# Altium PCB bdk_pl_power_connector.PcbDoc
Units mm, origin at the board's own origin, x right, y up, seen from the top; angles counter-clockwise.
Board outline 39.85 x 90.17 mm, 3 copper layers (Top Layer, Middle Layer, Bottom Layer), stack 0.49 mm thick; 3 components, 6 nets, 116 pads, 3 vias.
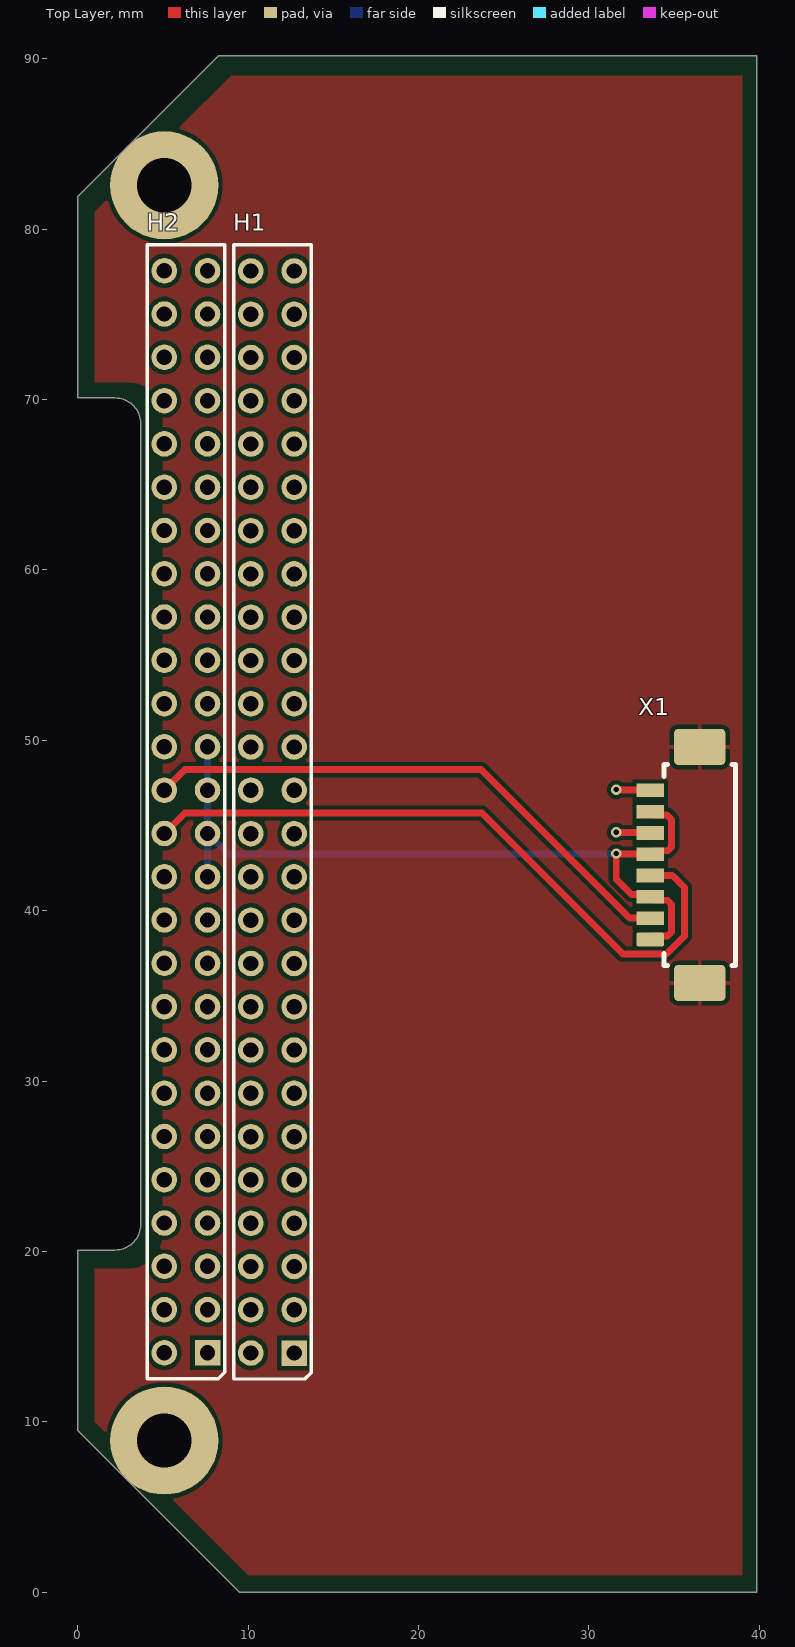
[diagram p0: Top Layer view]
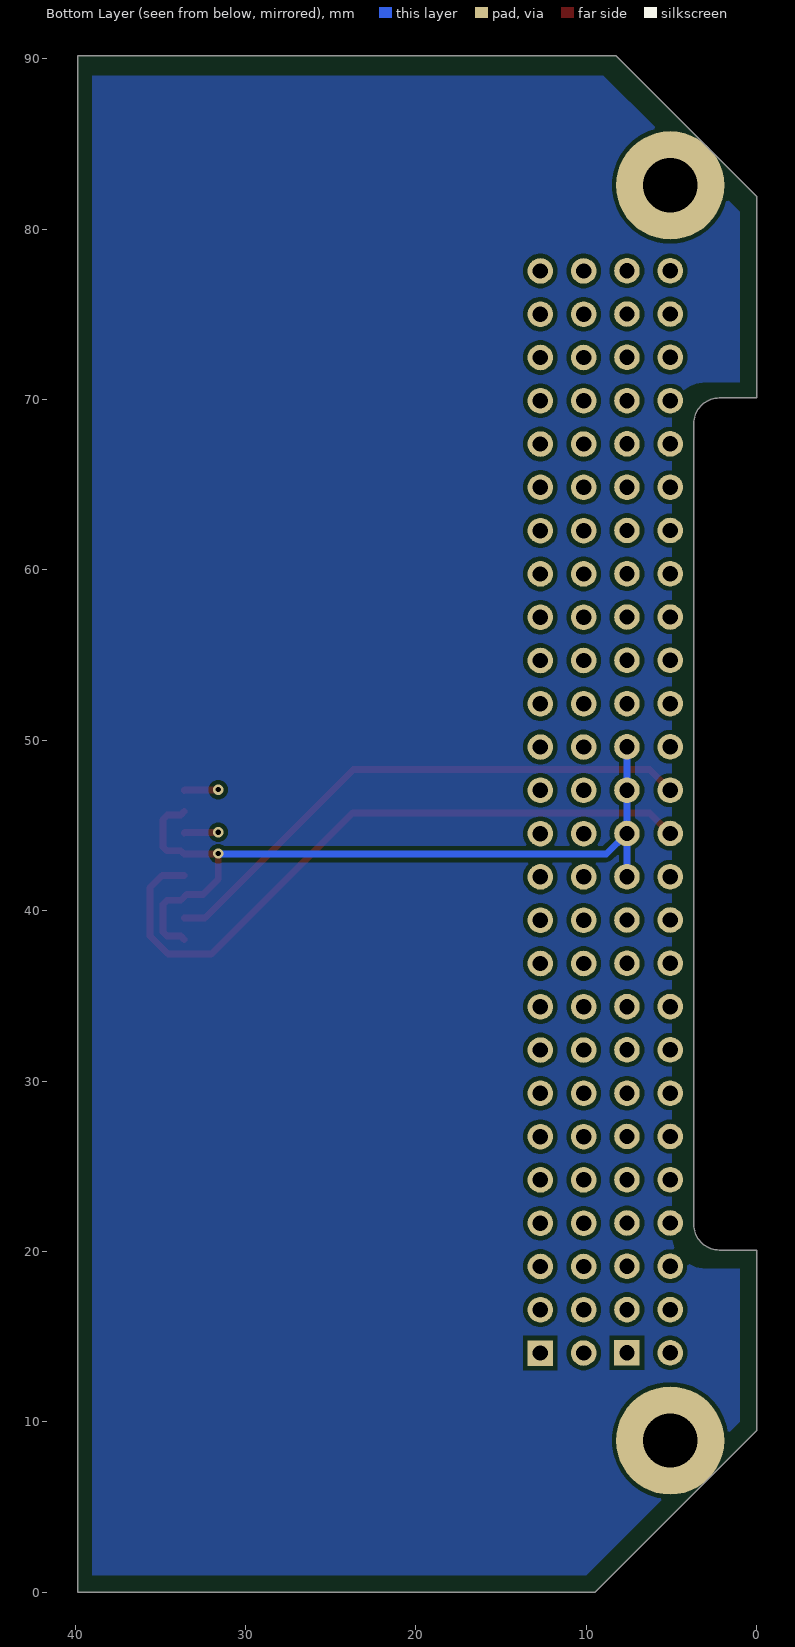
[diagram p1: Bottom Layer view, seen from below]
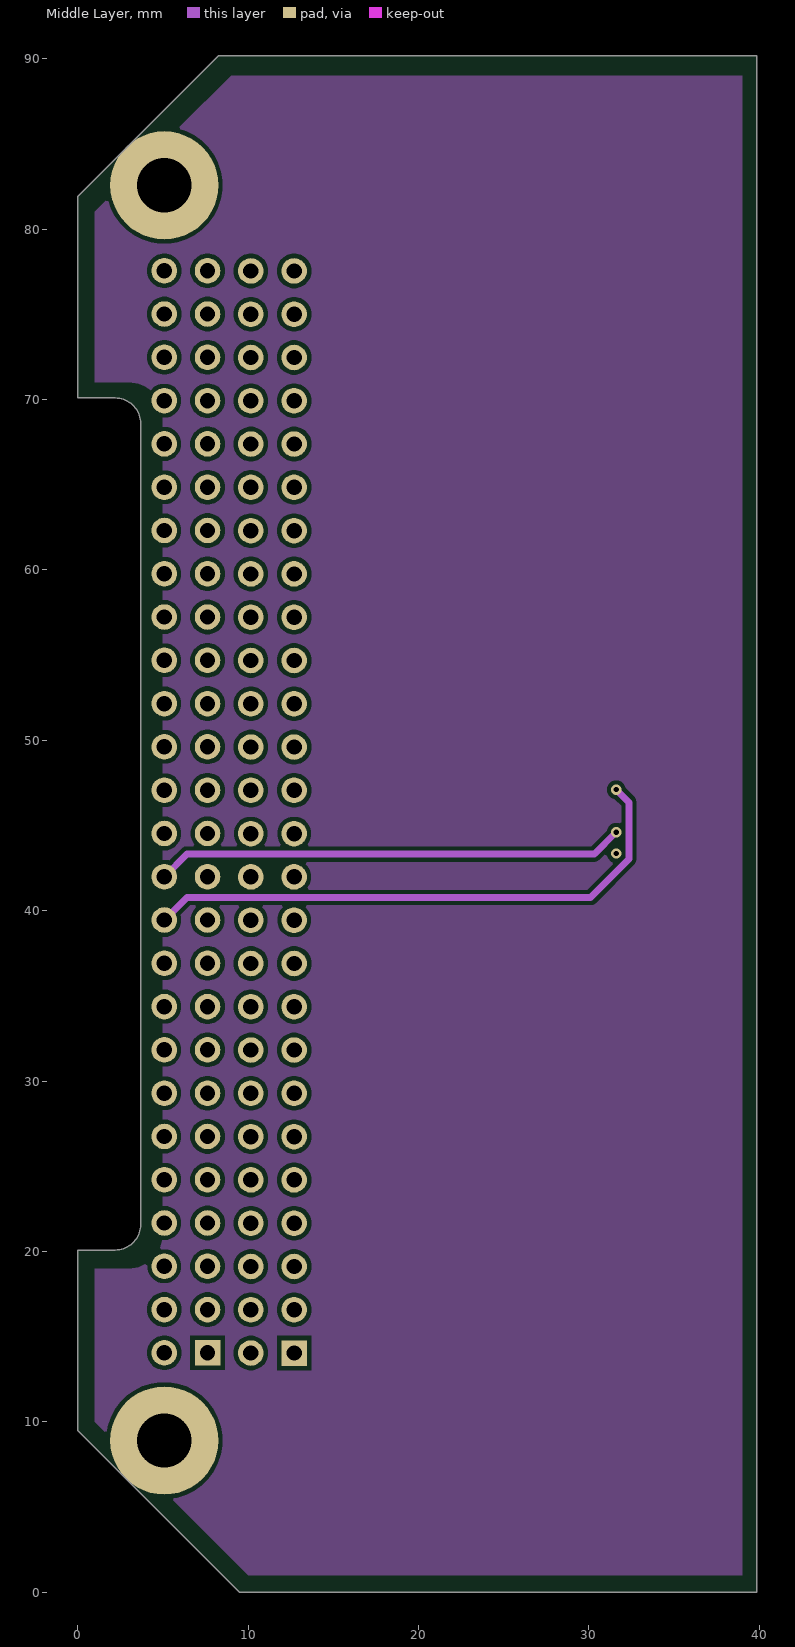
[diagram p2: Middle Layer]
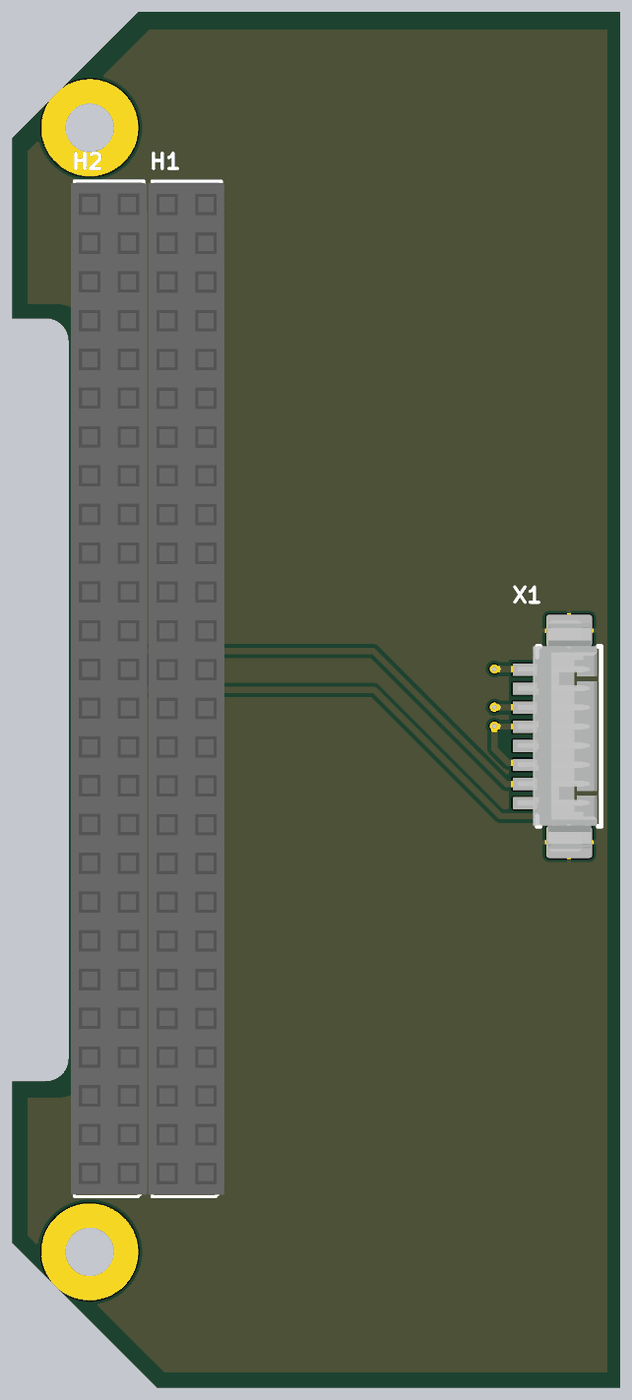
[diagram p3: 3D render of the assembled board from above, using the file's embedded part models]

## Layer stack, top to bottom
Top Solder: solder mask 0.01, Solder Resist, Dk 3.5
Top Layer: signal copper 0.03
Dielectric 2: prepreg 0.2, FR-4, Dk 4.8
Middle Layer: signal copper 0.03
Dielectric 1: dielectric 0.2, FR-4, Dk 4.8
Bottom Layer: signal copper 0.03
Bottom Solder: solder mask 0.01, Solder Resist, Dk 3.5

## Board outline
0,9.5 0,20.085 2.2,20.085 ccw(c2.2,21.585) 3.7,21.585 3.7,68.585 ccw(c2.2,68.585) 2.2,70.085 0,70.085 0,81.9 8.27,90.17 39.85,90.17 39.85,0 9.5,0

## Design rules (kind name [scope] priority, off if disabled: settings)
Clearance [All] p1: gap=0.254 ignorepadtopadclearanceinfootprint=FALSE except(0: Arc-Hole Track-Hole SMDPad-Hole THPad-Hole Via-Hole Fill-Hole Poly-Hole Region-Hole Text-Hole)
ComponentClearance [InComponent('H1') vs InComponent('H2')] p1: gap=0 collisioncheckmode=3 verticalgap=0.254 showdistances=FALSE
PolygonConnect [All] p1: connectstyle=Relief reliefconductorwidth=0.254 reliefentries=4 polygonreliefangle="90 Angle" airgapwidth=0.254
RoutingVias [All] p1: holewidth=0.711 width=1.27 viastyle="Through Hole" minholewidth=0.711 minwidth=1.27 maxholewidth=0.711 maxwidth=1.27
SolderMaskExpansion [All] p1: expansion=0.102 istentingtop=FALSE
Width [All] p1: maxlimit=2 minlimit=0.001 preferedwidth=0.4
29 further rules are at their usual default settings.

## Components (designator, comment, footprint, x,y, rotation, side; value= is the part's Value field where it differs from the comment)
H1 "ESQ-126-39-G-D" ESQ-126-39-G-D 12.7,14.04 r90 top locked
H2 "ESQ-126-39-G-D" ESQ-126-39-G-D 7.62,14.05 r90 top locked
X1 "MOLEX-PB-8" MOLEX-PB-8-R 33.625,38.335 r90 top

## Footprints (in the part's own frame and the unit in brackets; to place one, negate y for a bottom-side part, rotate by r counter-clockwise, add the part's x,y. Pads: shape width x height; smd on the part's side, far side on the other; paste and mask are expansions set on the pad)
ESQ-126-39-G-D [mm] ".100\" PC/10 Elevated Socket Strip"
  rect 1.5x1.5 hole 0.9: 1(0,0)
  round 1.5 hole 0.9: 2(0,2.54) 3(2.54,0) 4(2.54,2.54) 5(5.08,0) 6(5.08,2.54) 7(7.62,0) 8(7.62,2.54) 9(10.16,0) 10(10.16,2.54) 11(12.7,0) 12(12.7,2.54) 13(15.24,0) 14(15.24,2.54) 15(17.78,0) 16(17.78,2.54) 17(20.32,0) 18(20.32,2.54) 19(22.86,0) 20(22.86,2.54) 21(25.4,0) 22(25.4,2.54) 23(27.94,0) 24(27.94,2.54) 25(30.48,0) 26(30.48,2.54) 27(33.02,0) 28(33.02,2.54) 29(35.56,0) 30(35.56,2.54) 31(38.1,0) 32(38.1,2.54) 33(40.64,0) 34(40.64,2.54) 35(43.18,0) 36(43.18,2.54) 37(45.72,0) 38(45.72,2.54) 39(48.26,0) 40(48.26,2.54) 41(50.8,0) 42(50.8,2.54) 43(53.34,0) 44(53.34,2.54) 45(55.88,0) 46(55.88,2.54) 47(58.42,0) 48(58.42,2.54) 49(60.96,0) 50(60.96,2.54) 51(63.5,0) 52(63.5,2.54)
  silkscreen extent -1.53,-1 65.02,3.54, body extent -1.39,-1.22 64.9,3.78, height 11.2
MOLEX-PB-8-R [mm]
  rrect20% 0.8x1.6 smd: 1(-0.025,0.025)
  rect 0.8x1.6 smd: 2(1.225,0.025) 3(2.475,0.025) 4(3.725,0.025) 5(4.975,0.025) 6(6.225,0.025) 7(7.475,0.025) 8(8.725,0.025)
  rrect20% 2.1x3 smd: MP(-2.575,-2.875) MP(11.275,-2.875)
  silkscreen extent -1.55,-4.97 10.25,-0.77, body extent -3.2,-4.72 11.95,0.49, height 3.4

## Part data
H1 H2: "Elevated socket, dual-row, 26-pin per row", ComponentLink1Description=DataSheet, ComponentLink1URL=https://static.chipdip.ru/lib/071/DOC025071643.pdf, Назначение="Сквозной разъем, двойно, 52 контакта, шаг 2,54 мм", Наименование=ESQ-126-39-G-D, Потребление, Вт=0,00
X1: "MOLEX PicoBlade 8-pin", Назначение="MOLEX PicoBlade 8-pin to board", Наименование=MOLEX-PB-8-R, Потребление, Вт=0,001

## Free pads (board coordinates)
  round 6.35 hole 3.18: 1(5.08,8.905) 1(5.08,82.565)

## Via types
v1: diameter 0.6, hole 0.3, Top Layer to Bottom Layer, 3 vias

## Nets (pads, with @x,y where several pads share a name; then routed paths per layer and width w, separated by ;. In a path a pad name is that pad's centre, name@x,y a point inside that pad or via, vN(x,y) a via of type N, cw(c..) or ccw(c..) an arc to the next point about the centre after c; other vN are vias at no path point)
GND: X1.MP
OPT_GND: H2.23 H2.25 H2.27 H2.29 X1.1 X1.3 X1.5 X1.7 | length 47
  Top Layer w0.4: X1.1 33.8,38.51 34.616,38.51 34.854,38.748 34.854,40.372 34.616,40.61 33.8,40.61 33.456,40.954 32.496,40.954 31.6,41.85 v1(31.6,43.35) 31.62,43.33 33.58,43.33 X1.5 33.8,43.51 34.62,43.51 34.854,43.744 34.854,45.346 34.59,45.61 33.8,45.61 X1.7
  Bottom Layer w0.4: H2.23 H2.25 ; H2.29 H2.27 H2.25 ; v1(31.6,43.35) 31.566,43.316 8.834,43.316 H2.25
PL_POWER_CH1: H2.22 X1.8 | length 35.2
  Top Layer w0.4: v1(31.6,47.1) 31.62,47.08 33.58,47.08 X1.8
  Middle Layer w0.4: H2.22 6.406,40.776 30.092,40.776 32.354,43.038 32.354,46.346 v1(31.6,47.1)
PL_POWER_CH2: H2.24 X1.6 | length 29.6
  Top Layer w0.4: v1(31.6,44.6) 31.62,44.58 33.58,44.58 X1.6
  Middle Layer w0.4: H2.24 6.406,43.316 30.316,43.316 v1(31.6,44.6)
PL_POWER_CH3: H2.26 X1.4 | length 40
  Top Layer w0.4: H2.26 6.284,45.734 23.716,45.734 31.994,37.456 34.541,37.456 35.6,38.515 35.6,41.35 34.89,42.06 X1.4
PL_POWER_CH4: H2.28 X1.2 | length 32.6
  Top Layer w0.4: H2.28 6.284,48.274 23.676,48.274 32.39,39.56 X1.2
pads on no net: H1.1 H1.2 H1.3 H1.4 H1.5 H1.6 H1.7 H1.8 H1.9 H1.10 H1.11 H1.12 H1.13 H1.14 H1.15 H1.16 H1.17 H1.18 H1.19 H1.20 H1.21 H1.22 H1.23 H1.24 H1.25 H1.26 H1.27 H1.28 H1.29 H1.30 H1.31 H1.32 H1.33 H1.34 H1.35 H1.36 H1.37 H1.38 H1.39 H1.40 H1.41 H1.42 H1.43 H1.44 H1.45 H1.46 H1.47 H1.48 H1.49 H1.50 H1.51 H1.52 H2.1 H2.2 H2.3 H2.4 H2.5 H2.6 H2.7 H2.8 H2.9 H2.10 H2.11 H2.12 H2.13 H2.14 H2.15 H2.16 H2.17 H2.18 H2.19 H2.20 H2.21 H2.30 H2.31 H2.32 H2.33 H2.34 H2.35 H2.36 H2.37 H2.38 H2.39 H2.40 H2.41 H2.42 H2.43 H2.44 H2.45 H2.46 H2.47 H2.48 H2.49 H2.50 H2.51 H2.52

## Polygon pours and split planes (outlines as drawn)
GND on Top Layer "GND_L01_P001" (solid, pour order 1): 10,1 39,1 39,89 9,89 1,81 1,71 3,71 cw(c3,69) 5,69 5,21 cw(c3,21) 3,19 1,19 1,10
GND on Middle Layer "GND_L02_P000" (solid, pour order 0): 10,1 39,1 39,89 9,89 1,81 1,71 3,71 cw(c3,69) 5,69 5,21 cw(c3,21) 3,19 1,19 1,10
GND on Bottom Layer "GND_L03_P002" (solid, pour order 2): 10,1 39,1 39,89 9,89 1,81 1,71 3,71 cw(c3,69) 5,69 5,21 cw(c3,21) 3,19 1,19 1,10

## Silkscreen, mask and mechanical layers (free items; w line width, h text height)
Mechanical 1:
  lines w0.3: 0,9.5 9.5,0 9.845,0 39.85,0 39.85,90.17 8.27,90.17 0,81.9 0,70.085 2.2,70.085 cw(c2.2,68.585) 3.7,68.585 3.7,21.585 cw(c2.2,21.585) 2.2,20.085 0,20.085 0,9.5